# Altium PCB PCB1 MK3.PcbDoc
Units mm, origin at the board's own origin, x right, y up, seen from the top; angles counter-clockwise.
Board outline 68.58 x 98.42 mm, 2 copper layers (Top Layer, Bottom Layer); 17 components, 38 nets, 80 pads, 0 vias.
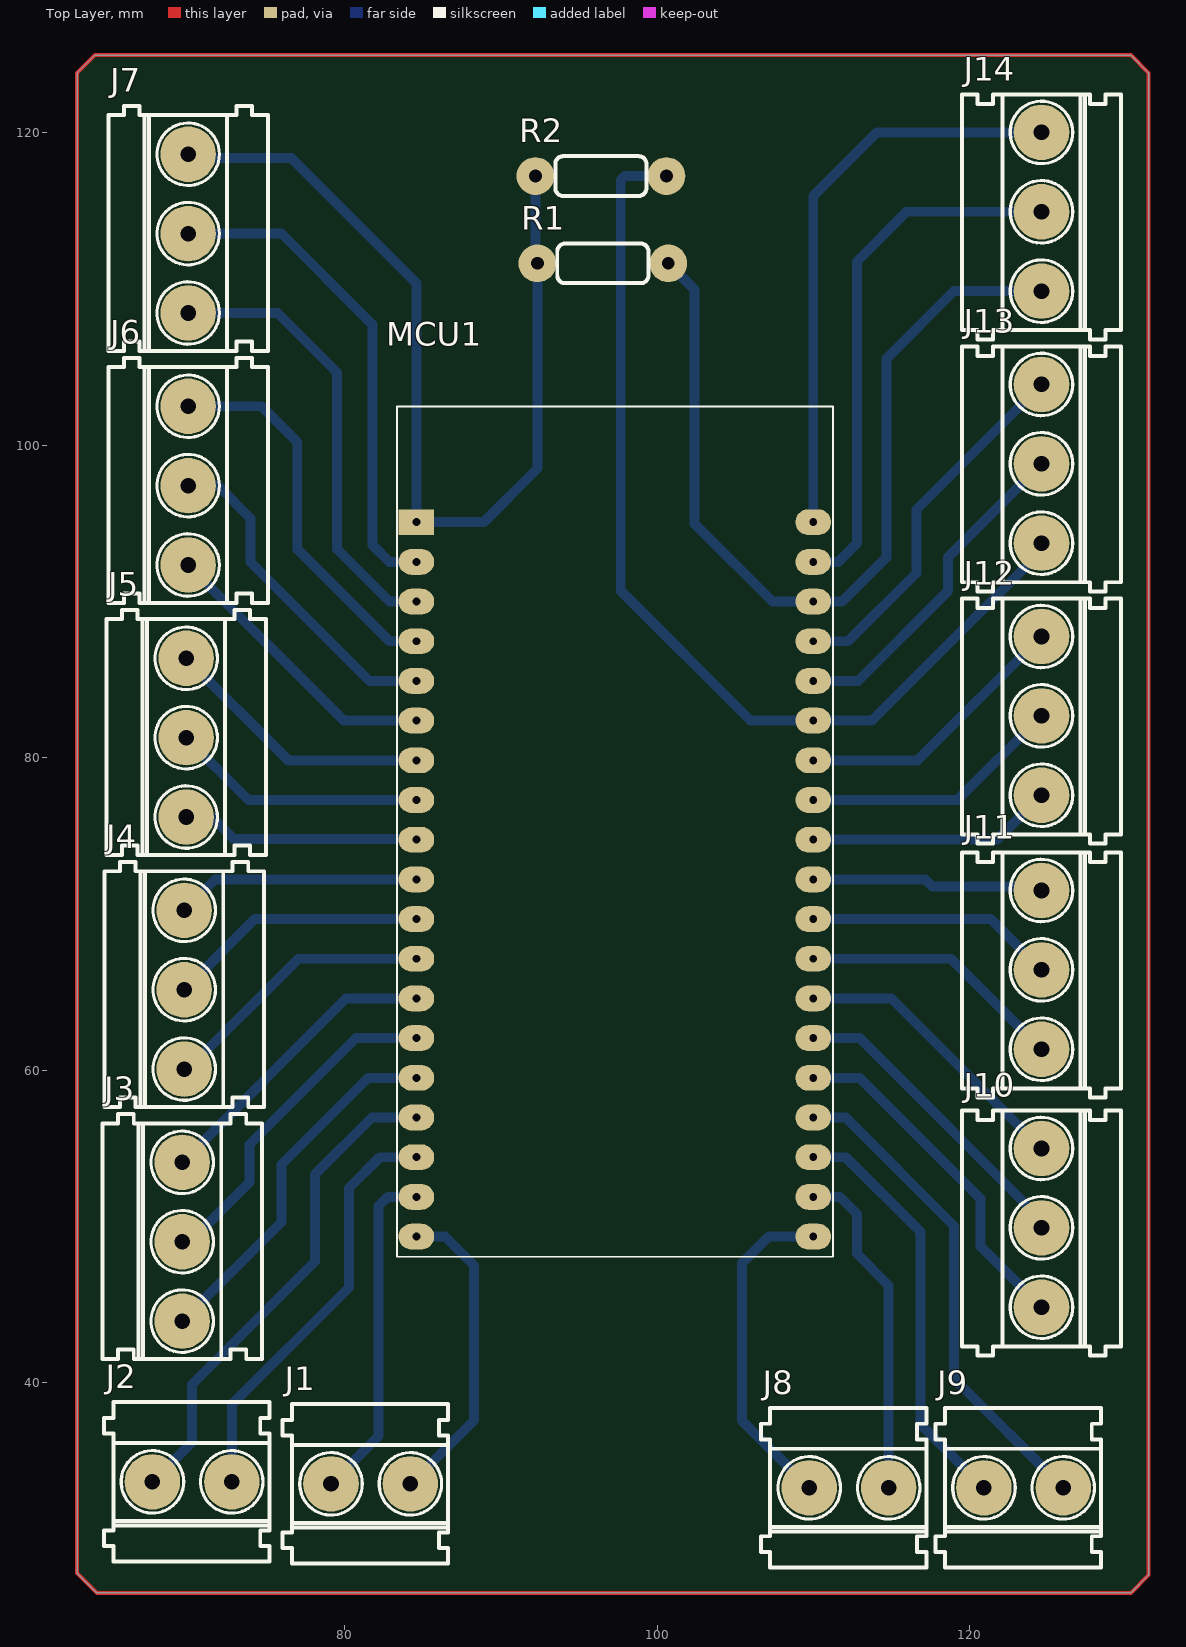
[diagram p0: Top Layer view]
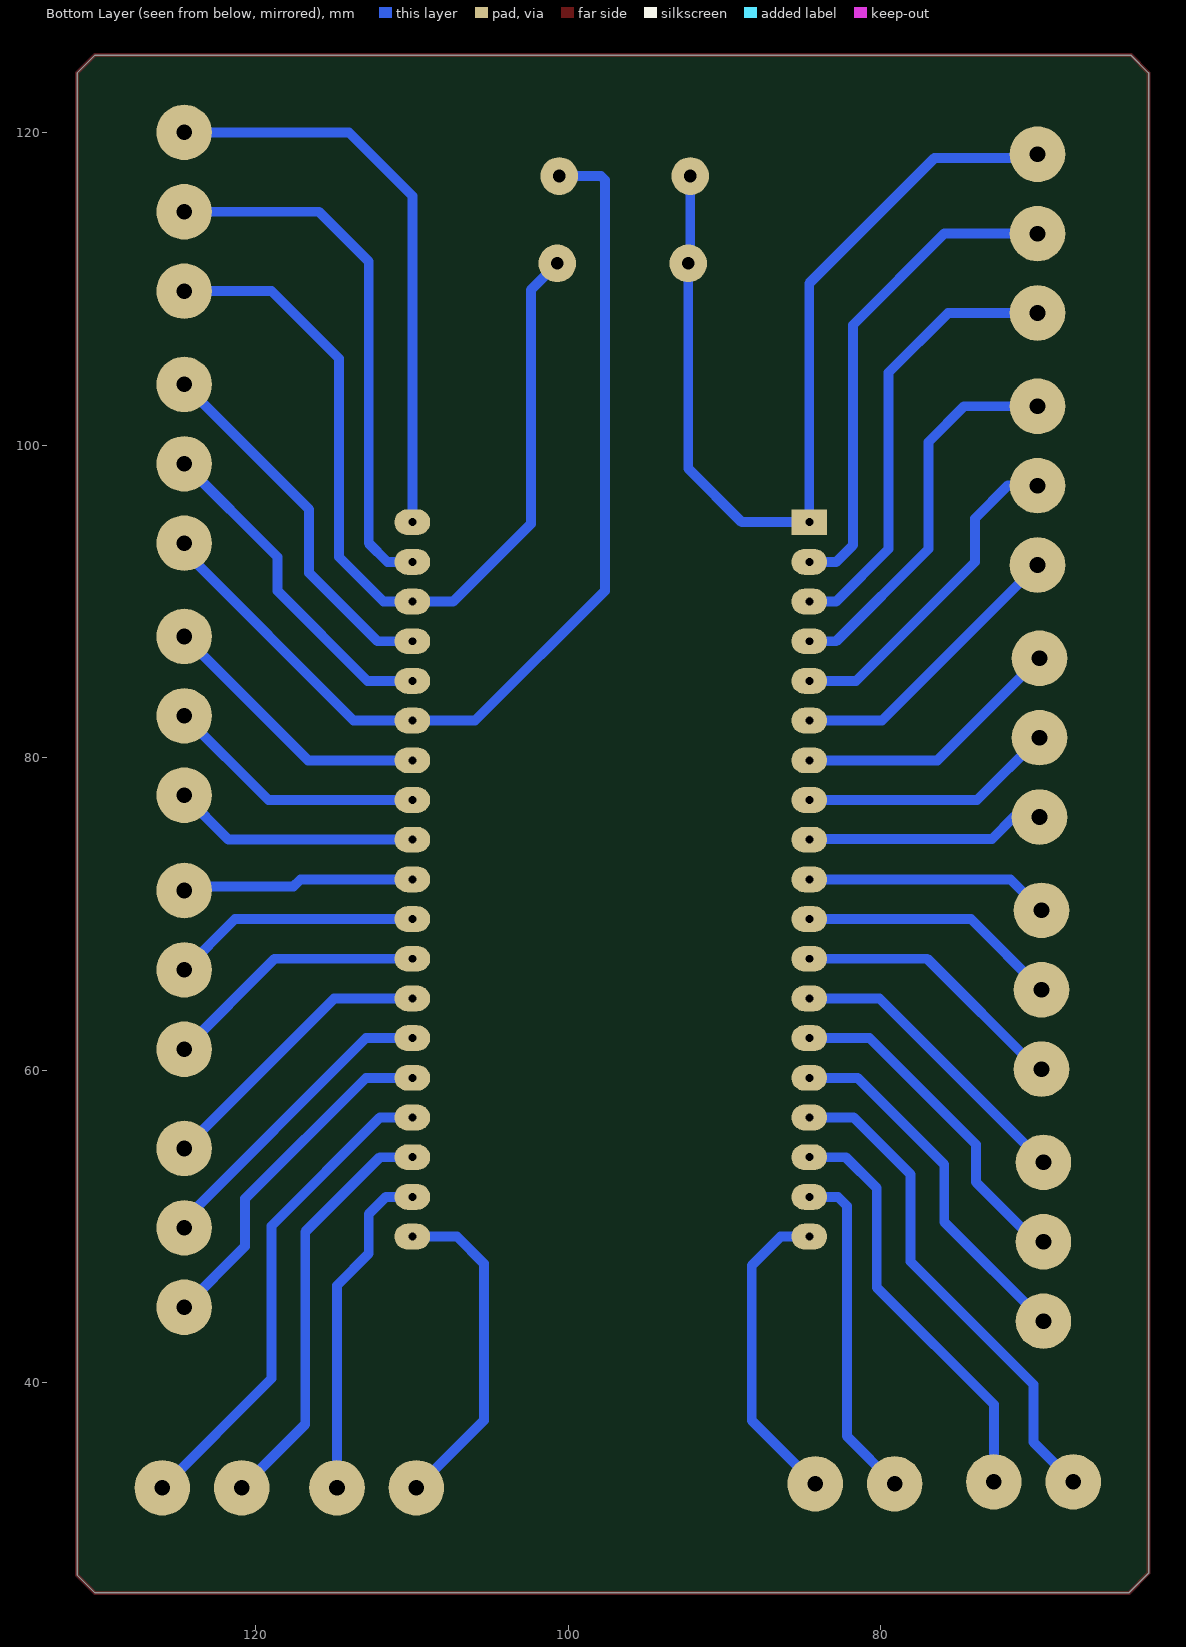
[diagram p1: Bottom Layer view, seen from below]
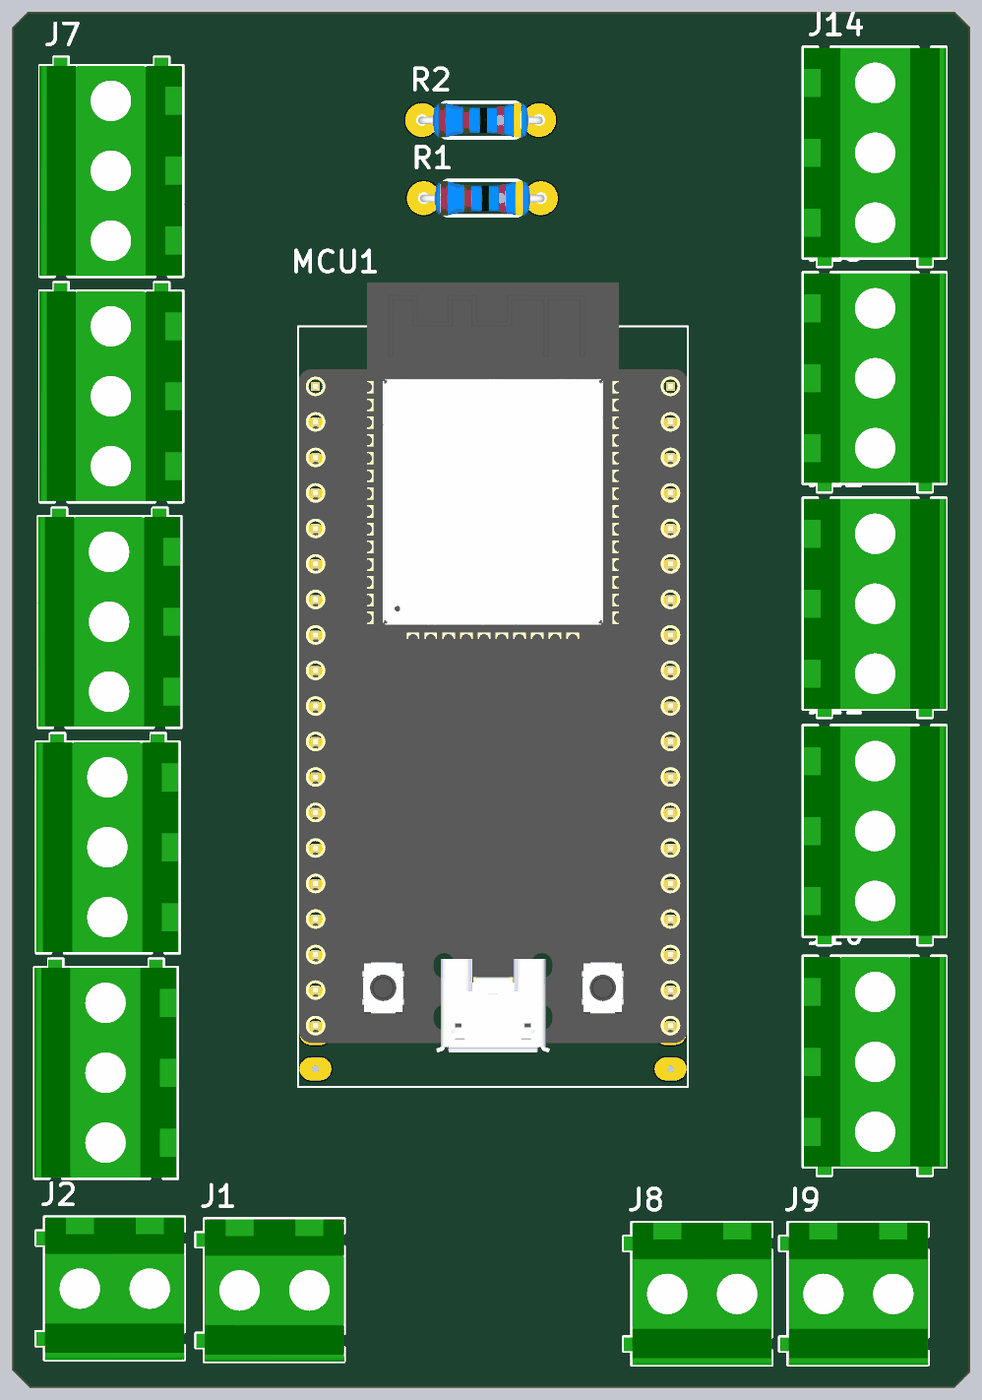
[diagram p2: 3D render of the assembled board from above, using the file's embedded part models]

## Layer stack, top to bottom
Top Solder: solder mask 0.0102, Solder Resist, Dk 3.5
Top Layer: signal copper 0.0356
Dielectric 1: dielectric 0.32, FR-4, Dk 4.8
Bottom Layer: signal copper 0.0356
Bottom Solder: solder mask 0.0102, Solder Resist, Dk 3.5

## Board outline
62.865,27.813 62.865,123.825 64.008,124.968 130.302,124.968 131.445,123.825 131.445,27.686 130.302,26.543 64.135,26.543

## Design rules (kind name [scope] priority, off if disabled: settings)
Clearance [All] p1: gap=0.254 ignorepadtopadclearanceinfootprint=FALSE except(0: Arc-Hole Track-Hole SMDPad-Hole THPad-Hole Via-Hole Fill-Hole Poly-Hole Region-Hole Text-Hole)
PolygonConnect [All] p1: connectstyle=Relief reliefconductorwidth=0.254 reliefentries=4 polygonreliefangle="90 Angle" airgapwidth=0.254
RoutingLayers [All] p1: top layer_v5=FALSE bottom layer_v5=TRUE
RoutingVias [All] p1: holewidth=0.711 width=1.27 viastyle="Through Hole" minholewidth=0.711 minwidth=1.27 maxholewidth=0.711 maxwidth=1.27
SolderMaskExpansion [All] p1: expansion=0.102
Width [All] p1: maxlimit=0.762 minlimit=0.508 preferedwidth=0.635 minimp=50.000000 maximp=50.000000 favimp=50.000000
29 further rules are at their usual default settings.

## Components (designator, comment, footprint, x,y, rotation, side; value= is the part's Value field where it differs from the comment)
J1 "" "TB_200Mil 2 P" 79.121,33.528 r0 top
J2 "" "TB_200Mil 2 P" 67.691,33.655 r0 top
J3 "" "TB_200Mil 3 P" 69.596,54.102 r270 top
J4 "" "TB_200Mil 3 P" 69.723,70.231 r270 top
J5 "" "TB_200Mil 3 P" 69.85,86.36 r270 top
J6 "" "TB_200Mil 3 P" 69.977,102.489 r270 top
J7 "" "TB_200Mil 3 P" 69.977,118.618 r270 top
J8 "" "TB_200Mil 2 P" 109.728,33.274 r0 top
J9 "" "TB_200Mil 2 P" 120.904,33.274 r0 top
J10 "" "TB_200Mil 3 P" 124.587,44.831 r90 top
J11 "" "TB_200Mil 3 P" 124.587,61.341 r90 top
J12 "" "TB_200Mil 3 P" 124.587,77.597 r90 top
J13 "" "TB_200Mil 3 P" 124.587,93.726 r90 top
J14 "" "TB_200Mil 3 P" 124.587,109.855 r90 top
MCU1 "ESP32-DEVKITC-32D" MODULE_ESP32-DEVKITC-32D 97.282,75.311 r0 top
R1 "4.7K" 4.7K 100.711,111.633 r180 top
R2 "4.7K" 4.7K 100.584,117.221 r180 top

## Footprints (in the part's own frame and the unit in brackets; to place one, negate y for a bottom-side part, rotate by r counter-clockwise, add the part's x,y. Pads: shape width x height; smd on the part's side, far side on the other; paste and mask are expansions set on the pad)
4.7K [mil]
  round 95 hole 32: 1(0,0) 2(330,0)
  silkscreen extent 50,-50 280,50, body extent -47,-48 377,50, height 38
MODULE_ESP32-DEVKITC-32D [mil]
  rect 90x65 hole 20: 1(-500,777.95)
  oval 90x65 hole 20: 2(-500,677.95) 3(-500,577.95) 4(-500,477.95) 5(-500,377.95) 6(-500,277.95) 7(-500,177.95) 8(-500,77.95) 9(-500,-22.05) 10(-500,-122.05) 11(-500,-222.05) 12(-500,-322.05) 13(-500,-422.05) 14(-500,-522.05) 15(-500,-622.05) 16(-500,-722.05) 17(-500,-822.05) 18(-500,-922.05) 19(-500,-1022.05) 20(500,777.95) 21(500,677.95) 22(500,577.95) 23(500,477.95) 24(500,377.95) 25(500,277.95) 26(500,177.95) 27(500,77.95) 28(500,-22.05) 29(500,-122.05) 30(500,-222.05) 31(500,-322.05) 32(500,-422.05) 33(500,-522.05) 34(500,-622.05) 35(500,-722.05) 36(500,-822.05) 37(500,-922.05) 38(500,-1022.05)
  silkscreen extent -549,-1073 549,1069, body extent -550,-976 550,1193, height 128
"TB_200Mil 2 P" [mil]
  round 140 hole 39.37: 1(0,0) 2(200,0)
  silkscreen extent -122,-201 295,201, body extent -121,-202 296,200, height 551
"TB_200Mil 3 P" [mil]
  round 140 hole 39.37: 1(0,0) 2(200,0) 3(400,0)
  silkscreen extent -122,-201 495,201, body extent -121,-203 493,199, height 551

## Part data
J1 J2 J8 J9: library part "TB 2 PIN"
J3 J4 J5 J6 J7 J10 J11 J12 J13 J14: library part "TB 3 PIN"
MCU1: "EVAL BOARD FOR ESP-WROOM-32"

## Nets (pads, with @x,y where several pads share a name; then routed paths per layer and width w, separated by ;. In a path a pad name is that pad's centre, name@x,y a point inside that pad or via, vN(x,y) a via of type N, cw(c..) or ccw(c..) an arc to the next point about the centre after c; other vN are vias at no path point)
NetJ1_1: J1.1 MCU1.18 | length 21.7
  Bottom Layer w0.635: J1.1 82.169,36.576 82.169,51.308 82.752,51.891 MCU1.18
NetJ1_2: J1.2 MCU1.19 | length 20.1
  Bottom Layer w0.635: J1.2 88.265,37.592 88.265,47.498 86.412,49.351 MCU1.19
NetJ2_1: J2.1 MCU1.16 | length 32
  Bottom Layer w0.635: J2.1 70.231,36.195 70.231,39.878 78.105,47.752 78.105,53.34 81.736,56.971 MCU1.16
NetJ2_2: J2.2 MCU1.17 | length 27
  Bottom Layer w0.635: J2.2 72.771,38.608 80.264,46.101 80.264,52.451 82.244,54.431 MCU1.17
NetJ3_1: J3.1 MCU1.13 | length 19.3
  Bottom Layer w0.635: J3.1 80.085,64.591 MCU1.13
NetJ3_2: J3.2 MCU1.14 | length 23
  Bottom Layer w0.635: J3.2@68.707,49.022 J3.2 ; J3.2@69.342,49.276 J3.2 ; MCU1.14 80.72,62.051 73.914,55.245 73.914,52.832 70.104,49.022 J3.2
NetJ3_3: J3.3 MCU1.15 | length 23.6
  Bottom Layer w0.635: J3.3 75.946,50.292 75.946,53.975 81.482,59.511 MCU1.15
NetJ4_1: J4.1 MCU1.10 | length 15.7
  Bottom Layer w0.635: J4.1 71.703,72.211 MCU1.10
NetJ4_2: J4.2 MCU1.11 | length 16.7
  Bottom Layer w0.635: J4.2 74.243,69.671 MCU1.11
NetJ4_3: J4.3 MCU1.12 | length 17.8
  Bottom Layer w0.635: J4.3 69.977,60.071 77.037,67.131 MCU1.12
NetJ5_1: J5.1 MCU1.7 | length 17.4
  Bottom Layer w0.635: J5.1 76.379,79.831 MCU1.7
NetJ5_2: J5.2 MCU1.8 | length 16.4
  Bottom Layer w0.635: J5.2 73.839,77.291 MCU1.8
NetJ5_3: J5.3 MCU1.9 | length 15.3
  Bottom Layer w0.635: J5.3 71.501,76.2 72.898,74.803 84.53,74.803 MCU1.9
NetJ6_1: J6.1 MCU1.4 | length 24.9
  Bottom Layer w0.635: J6.1 74.676,102.489 76.962,100.203 76.962,93.345 82.856,87.451 MCU1.4
NetJ6_2: J6.2 MCU1.5 | length 21.4
  Bottom Layer w0.635: J6.2 71.882,97.409 73.977,95.313 73.977,92.519 81.586,84.911 MCU1.5
NetJ6_3: J6.3 MCU1.6 | length 18.7
  Bottom Layer w0.635: J6.3 79.935,82.371 MCU1.6
NetJ7_1: J7.1 MCU1.1 R1.2 R2.2 | length 61.3
  Bottom Layer w0.635: J7.1 70.231,118.364 76.581,118.364 84.582,110.363 MCU1.1 88.9,95.071 92.329,98.5 R1.2 92.202,111.76 R2.2
NetJ7_2: J7.2 MCU1.2 | length 31.6
  Bottom Layer w0.635: J7.2 75.946,113.538 81.788,107.696 81.788,93.599 82.856,92.531 MCU1.2
NetJ7_3: J7.3 MCU1.3 | length 28.9
  Bottom Layer w0.635: J7.3 75.692,108.458 79.502,104.648 79.502,93.345 82.856,89.991 MCU1.3
NetJ8_1: J8.1 MCU1.38 | length 21.4
  Bottom Layer w0.635: J8.1 105.41,37.592 105.41,47.625 107.136,49.351 MCU1.38
NetJ8_2: J8.2 MCU1.37 | length 21.6
  Bottom Layer w0.635: MCU1.37 111.685,51.891 112.776,50.8 112.776,48.26 114.808,46.228 J8.2
NetJ9_1: J9.1 MCU1.36 | length 26.9
  Bottom Layer w0.635: MCU1.36 112.066,54.431 116.84,49.657 116.84,37.338 J9.1
NetJ9_2: J9.2 MCU1.35 | length 31.5
  Bottom Layer w0.635: MCU1.35 112.066,56.971 118.999,50.038 118.999,40.259 J9.2
NetJ10_1: J10.1 MCU1.34 | length 22.5
  Bottom Layer w0.635: MCU1.34 112.955,59.511 120.688,51.778 120.688,48.73 J10.1
NetJ10_2: J10.2 MCU1.33 | length 19.9
  Bottom Layer w0.635: MCU1.33 112.955,62.051 124.587,50.419 J10.2
NetJ10_3: J10.3 MCU1.32 | length 18.6
  Bottom Layer w0.635: MCU1.32 114.987,64.591 J10.3
NetJ11_1: J11.1 MCU1.31 | length 17
  Bottom Layer w0.635: MCU1.31 118.797,67.131 J11.1
NetJ11_2: J11.2 MCU1.30 | length 16
  Bottom Layer w0.635: MCU1.30 121.337,69.671 J11.2
NetJ11_3: J11.3 MCU1.29 | length 14.9
  Bottom Layer w0.635: MCU1.29 117.146,72.211 117.602,71.755 124.333,71.755 J11.3
NetJ12_1: J12.1 MCU1.28 | length 15.8
  Bottom Layer w0.635: MCU1.28 121.741,74.751 J12.1
NetJ12_2: J12.2 MCU1.27 | length 16.8
  Bottom Layer w0.635: MCU1.27 119.201,77.291 J12.2
NetJ12_3: J12.3 MCU1.26 | length 17.9
  Bottom Layer w0.635: MCU1.26 116.661,79.831 J12.3
NetJ13_1: J13.1 MCU1.25 R2.1 | length 64.7
  Bottom Layer w0.635: R2.1 97.917,117.221 97.663,116.967 97.663,90.678 105.97,82.371 MCU1.25 113.74,82.371 124.587,93.218 J13.1
NetJ13_2: J13.2 MCU1.24 | length 21.6
  Bottom Layer w0.635: MCU1.24 112.851,84.911 118.618,90.678 118.618,92.837 J13.2
NetJ13_3: J13.3 MCU1.23 | length 23.8
  Bottom Layer w0.635: MCU1.23 112.216,87.451 116.586,91.821 116.586,95.885 J13.3
NetJ14_1: J14.1 MCU1.22 R1.1 | length 57.3
  Bottom Layer w0.635: R1.1 102.399,109.945 102.39,109.936 102.39,94.968 107.367,89.991 MCU1.22 111.835,89.991 114.681,92.837 114.681,105.537 118.999,109.855 J14.1
NetJ14_2: J14.2 MCU1.21 | length 34.4
  Bottom Layer w0.635: MCU1.21 111.581,92.531 112.776,93.726 112.776,111.76 115.951,114.935 J14.2
NetJ14_3: J14.3 MCU1.20 | length 37.2
  Bottom Layer w0.635: MCU1.20 109.982,115.951 114.046,120.015 J14.3
copper on no net: | length 331.3
  Top Layer w0.254: 62.865,27.813 64.135,26.543 130.302,26.543 131.445,27.686 131.445,123.825 130.302,124.968 64.008,124.968 62.865,123.825 62.865,27.813

## Dimensions
111.232,102.461 to 119.487,101.226 on Mechanical 1
83.332,102.461 to 75.077,104.989 on Mechanical 1